# Altium PCB RF.PcbDoc
Units mm, origin at the board's own origin, x right, y up, seen from the top; angles counter-clockwise.
Board outline 90.1 x 47.1 mm, 2 copper layers (Top Layer, Bottom Layer); 48 components, 55 nets, 187 pads, 325 vias.
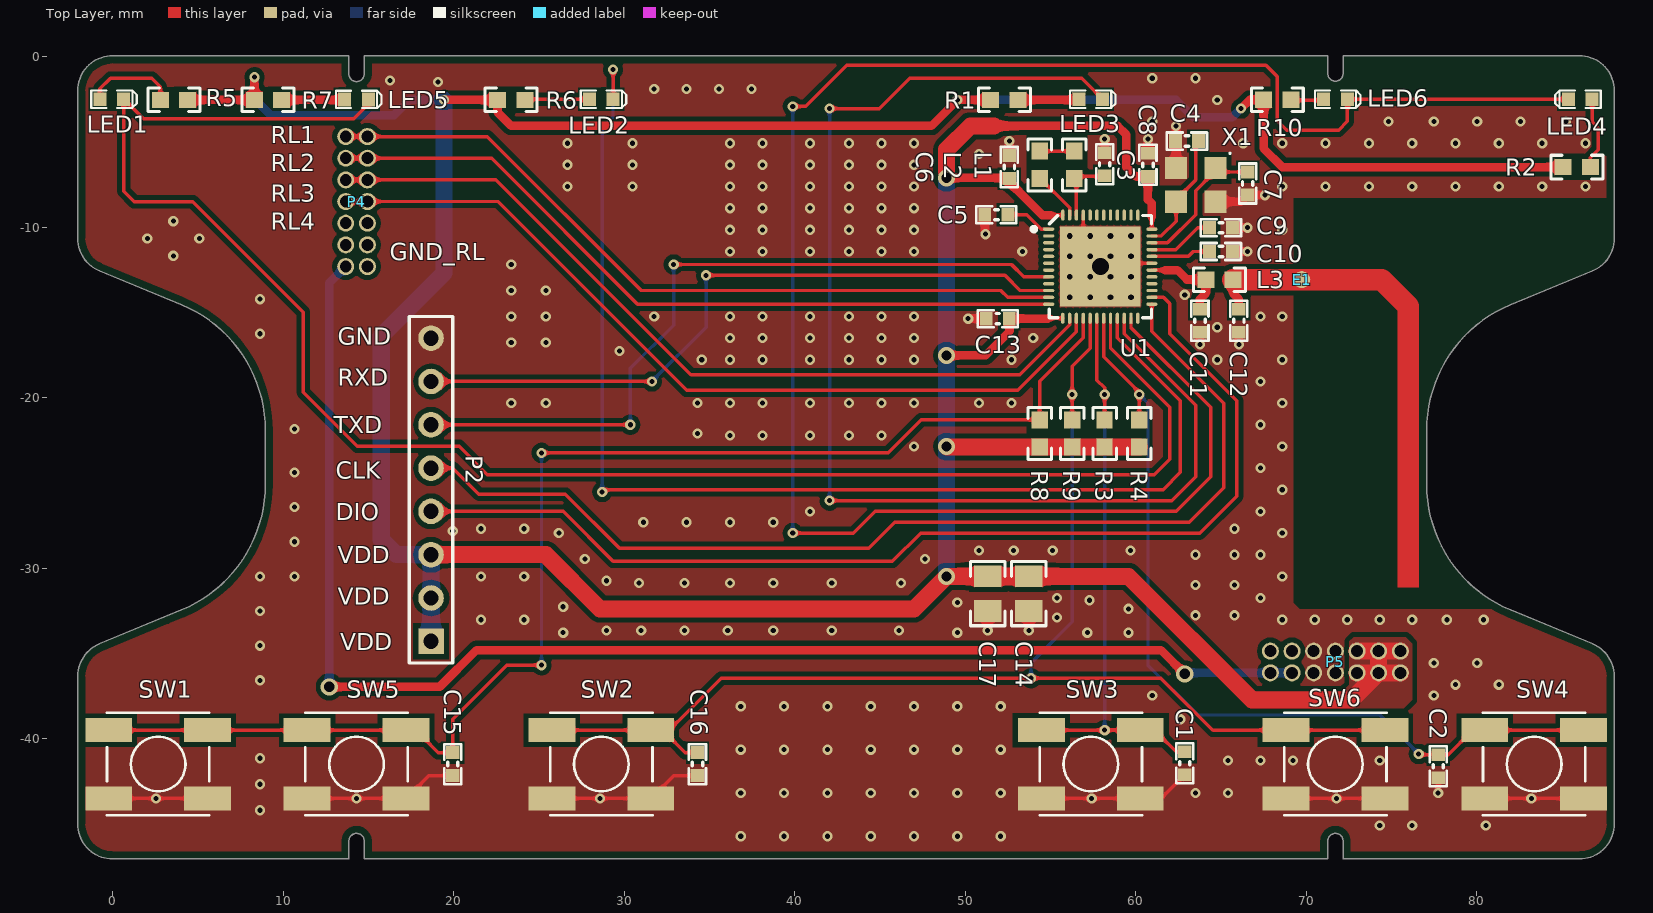
[diagram p0: Top Layer view]
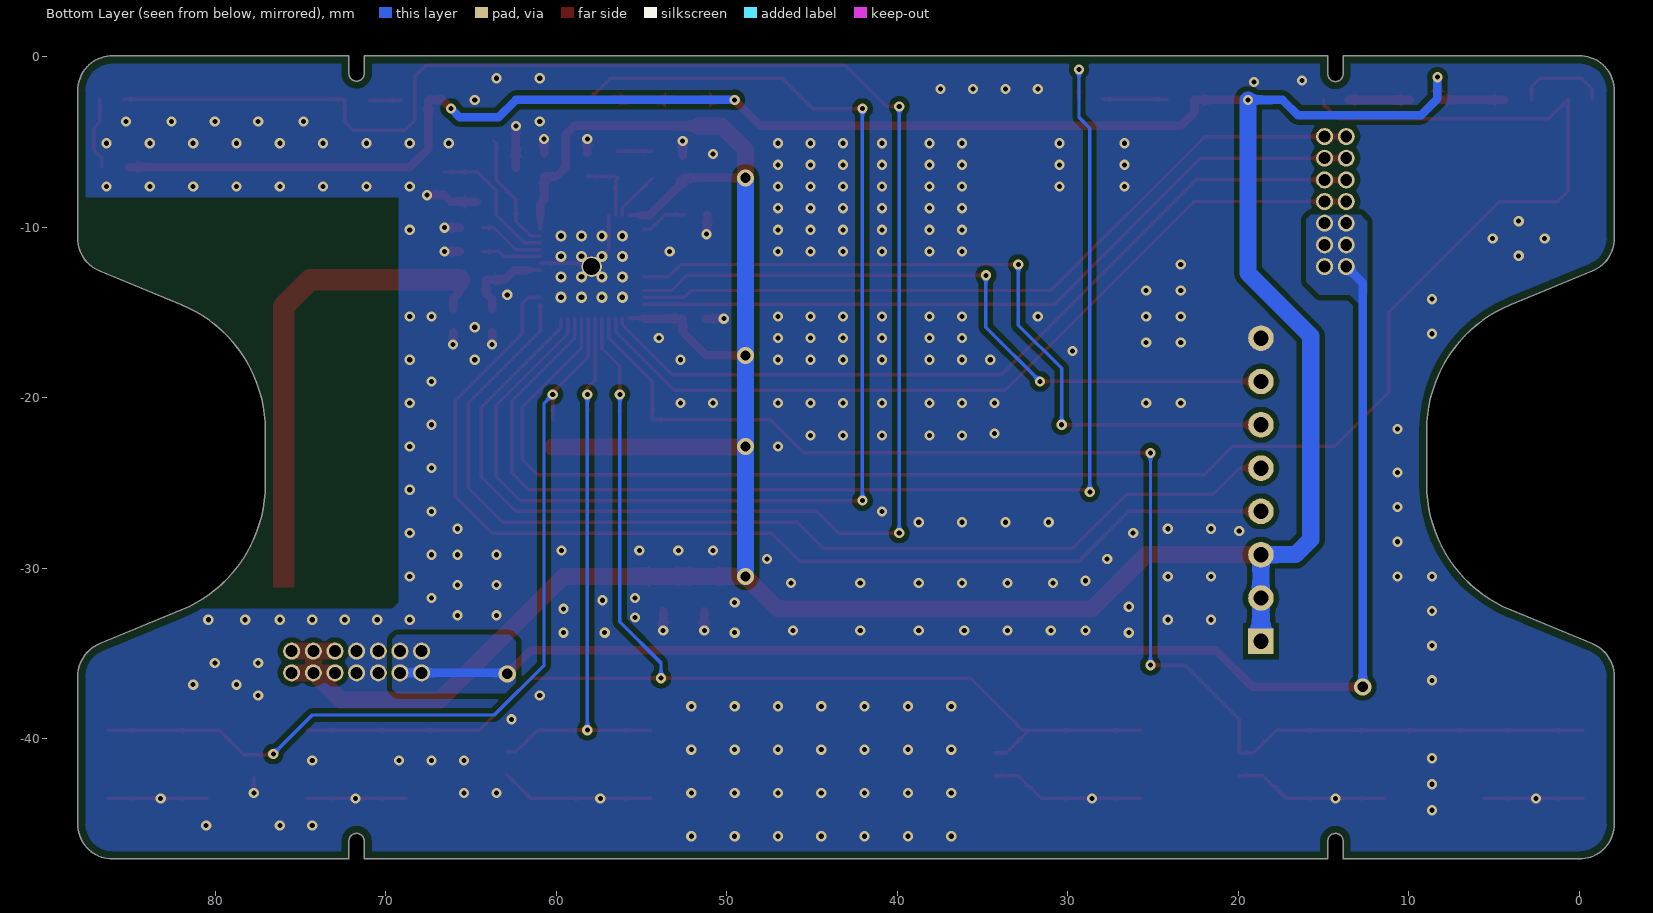
[diagram p1: Bottom Layer view, seen from below]
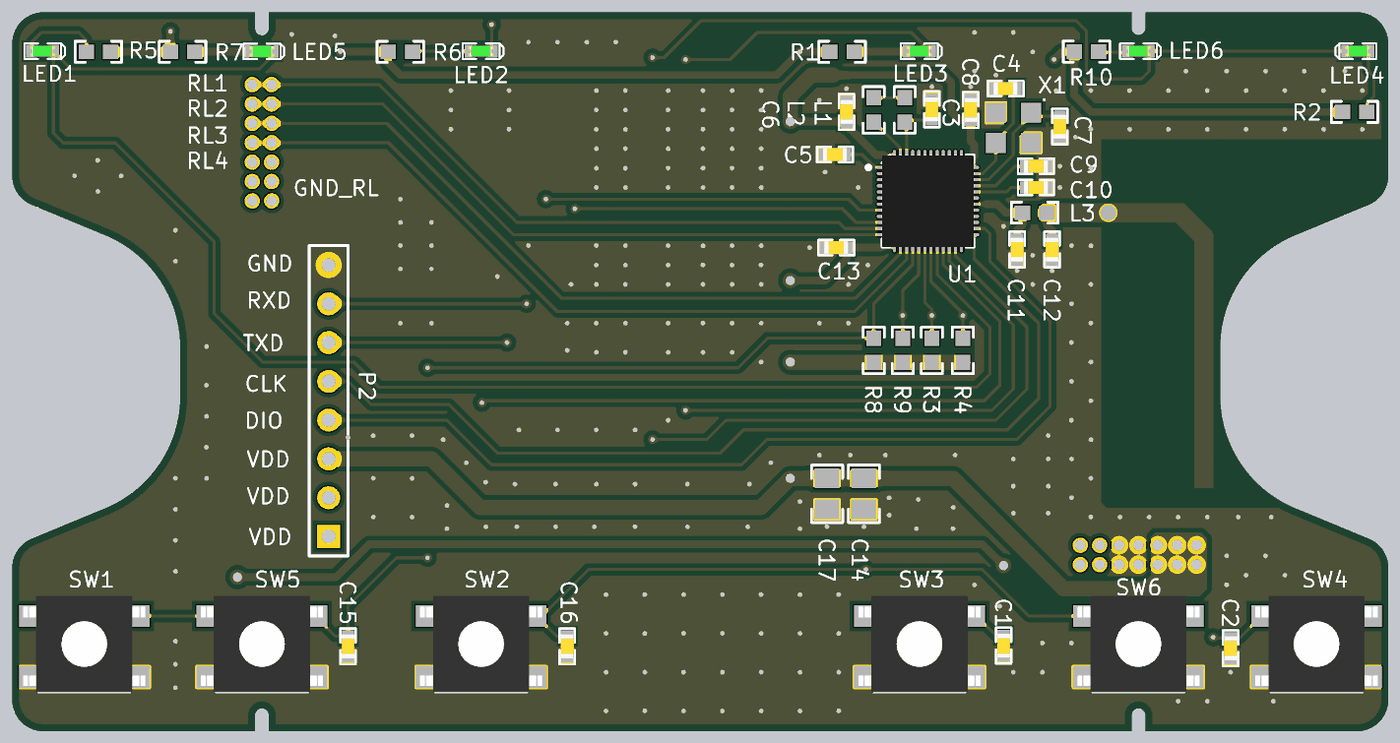
[diagram p2: 3D render of the assembled board from above, using the file's embedded part models]

## Layer stack, top to bottom
Top Solder: solder mask 0.0102, Solder Resist, Dk 3.5
Top Layer: signal copper 0.0356
Dielectric 1: dielectric 0.32, FR-4, Dk 4.8
Bottom Layer: signal copper 0.0356
Bottom Solder: solder mask 0.0102, Solder Resist, Dk 3.5

## Board outline
-2.05,-36.336 cw(c0,-36.336) -0.785,-34.442 4.042,-32.443 cw(c4.061,-32.489) 4.042,-32.443 ccw(c1,-25.098) 8.95,-25.098 8.95,-21.902 ccw(c1,-21.902) 4.042,-14.557 cw(c4.061,-14.511) 4.042,-14.557 -0.785,-12.558 cw(c0,-10.664) -2.05,-10.664 -2.05,-2 cw(c0,-2) 0,0.05 13.8,0.05 cw(c13.8,0) 13.85,0 13.85,-1.016 ccw(c14.3,-1.016) 14.75,-1.016 cw(c14.8,-1.016) 14.75,-1.016 14.75,0 cw(c14.8,0) 14.8,0.05 71.2,0.05 cw(c71.2,0) 71.25,0 71.25,-0.991 ccw(c71.7,-0.991) 72.15,-0.992 72.15,0 cw(c72.2,0) 72.2,0.05 86,0.05 cw(c86,-2) 88.05,-2 88.05,-10.664 cw(c86,-10.664) 86.785,-12.558 81.958,-14.557 ccw(c81.939,-14.511) 81.958,-14.557 ccw(c85,-21.902) 77.05,-21.902 77.05,-25.098 ccw(c85,-25.098) 81.958,-32.443 cw(c81.939,-32.489) 81.958,-32.443 86.785,-34.442 cw(c86,-36.336) 88.05,-36.336 88.05,-45 cw(c86,-45) 86,-47.05 72.2,-47.05 cw(c72.2,-47) 72.15,-47 72.15,-46.005 cw(c72.2,-46) 72.149,-46 ccw(c71.7,-46) 71.25,-45.985 71.25,-47 cw(c71.2,-47) 71.2,-47.05 14.8,-47.05 cw(c14.8,-47) 14.75,-47 14.75,-46.005 cw(c14.8,-46) 14.749,-46 ccw(c14.3,-46) 13.85,-45.995 cw(c13.8,-45.999) 13.85,-45.999 13.85,-47 cw(c13.8,-47) 13.8,-47.05 0,-47.05 cw(c0,-45) -2.05,-45

## Design rules (kind name [scope] priority, off if disabled: settings)
Clearance [All] p1: gap=0.3
HoleSize [All] p1: absolutevalues=TRUE maxlimit=10 minlimit=0.025 maxpercent=80.000 minpercent=20.000
MinimumSolderMaskSliver [All] p1: minsoldermaskwidth=0.01
PolygonConnect [All] p1: connectstyle=Direct reliefconductorwidth=0.254 reliefentries=4 polygonreliefangle="90 Angle" airgapwidth=0.254
RoutingVias [All] p1: holewidth=0.711 width=1.27 viastyle="Through Hole" minholewidth=0.3 minwidth=0.3 maxholewidth=5 maxwidth=5
SilkToSilkClearance [All] p1: silktosilkclearance=0.127
SilkToSolderMaskClearance [IsPad] p1: minsilkscreentomaskgap=0.01 clearancetoexposedcopper=TRUE
SolderMaskExpansion [All] p1: expansion=0.102
Width [All] p1: maxlimit=2 minlimit=0.2 preferedwidth=0.254
26 further rules are at their usual default settings.

## Components (designator, comment, footprint, x,y, rotation, side; value= is the part's Value field where it differs from the comment)
C1 "1.0µF" CAPC1608X06L 62.865,-41.442 r90 top
C2 "1.0µF" CAPC1608X06L 77.724,-41.616 r90 top
C3 "1.0µF" CAPC1608X06L 58.166,-6.31 r270 top
C4 "12pF" CAPC1608X06L 62.992,-4.953 r180 top
C5 "100nF" CAPC1608X06L 51.816,-9.271 r180 top
C6 "4.7µF" CAPC1608X06L 52.578,-6.477 r90 top
C7 "12pF" CAPC1608X06L 66.548,-7.442 r270 top
C8 "100nF" CAPC1608X06L 60.706,-6.35 r90 top
C9 "100pF" CAPC1608X06L 64.984,-10.033 r0 top
C10 "N.C." CAPC1608X06L 64.984,-11.43 r0 top
C11 "0.8pF" CAPC1608X06L 63.754,-15.494 r90 top
C12 "1.2pF" CAPC1608X06L 66.04,-15.494 r270 top
C13 "100nF" CAPC1608X06L 51.903,-15.367 r180 top
C14 "106" 0805_HV 53.721,-31.496 r90 top
C15 "1.0µF" CAPC1608X06L 19.939,-41.489 r270 top
C16 "1.0µF" CAPC1608X06L 34.29,-41.489 r90 top
C17 "104" 0805_HV 51.308,-31.496 r90 top
E1 "Antenna" nrfant 69.723,-13.081 r270 top
L1 "15nH" 0603 56.388,-6.35 r90 top
L2 "10µH" 0603 54.356,-6.35 r270 top
L3 "3.9nH" 0603 64.897,-13.081 r0 top
LED1 "L0603G" LED_0603_G -0.05,-2.5 r180 top
LED2 "L0603G" LED_0603_G 28.65,-2.5 r180 top
LED3 "L0603G" LED_0603_G 57.35,-2.5 r180 top
LED4 "L0603G" LED_0603_G 86.05,-2.5 r0 top
LED5 "L0603G" LED_0603_G 14.3,-2.515 r180 top
LED6 "L0603G" LED_0603_G 71.7,-2.501 r180 top
P2 "Header 8" HDR1X8 18.669,-34.29 r90 top
P4 "Header 7X2" CON14_1.27 13.665,-4.69 r270 top
P5 "Header 7X2" CON14_1.27 75.505,-34.865 r180 top
R1 "220R" 0603 52.286,-2.54 r180 top
R2 "220R" 0603 85.852,-6.477 r180 top
R3 "100k" 0603 58.166,-22.098 r270 top
R4 "100k" 0603 60.198,-22.098 r270 top
R5 "220R" 0603 3.594,-2.54 r0 top
R6 "220R" 0603 23.368,-2.54 r180 top
R7 "220R" 0603 9.106,-2.54 r180 top
R8 "100k" 0603 54.356,-22.098 r270 top
R9 "100k" 0603 56.261,-22.098 r270 top
R10 "220R" 0603 68.288,-2.527 r180 top
SW1 "PB SW" KSC521J 2.667,-41.499 r0 top locked
SW2 "PB SW" KSC521J 28.652,-41.499 r0 top locked
SW3 "PB SW" KSC521J 57.356,-41.499 r0 top locked
SW4 "PB SW" KSC521J 83.354,-41.499 r0 top locked
SW5 "PB SW" KSC521J 14.3,-41.499 r0 top locked
SW6 "PB SW" KSC521J 71.694,-41.499 r0 top locked
U1 "nRF52832-QFAA" QFN40P600X600X90-48N 57.912,-12.319 r0 top
X1 "CX3225SB32000D0FFFCC" SON230P260X60-4N 63.507,-7.524 r270 top

## Footprints (in the part's own frame and the unit in brackets; to place one, negate y for a bottom-side part, rotate by r counter-clockwise, add the part's x,y. Pads: shape width x height; smd on the part's side, far side on the other; paste and mask are expansions set on the pad)
0603 [mm] "0603 from SM-752 data"
  rect 1x0.95 smd: 1(-0.8,0) 2(0.8,0)
  silkscreen extent -1.52,-0.69 1.52,0.69, body extent -0.87,-0.47 0.87,0.47, height 1
0805_HV [mil] "0805 with 30mil clearance between pads"
  rect 50x63 smd: 1(-40,0) 2(40,0)
  silkscreen extent -74,-40 74,40, body extent -43,-29 43,29, height 57
CAPC1608X06L [mm]
  rect 0.75x0.8 smd: 1(-0.675,0) 2(0.675,0)
  silkscreen extent -1.17,-0.5 1.17,0.5, body extent -0.8,-0.43 0.8,0.43, height 0.8
CON14_1.27 [mm]
  round 1 hole 0.7: 1(0,0) 2(0,1.27) 3(1.27,0) 4(1.27,1.27) 5(2.54,0) 6(2.54,1.27) 7(3.81,0) 8(3.81,1.27) 9(5.08,0) 10(5.08,1.27) 11(6.35,0) 12(6.35,1.27) 13(7.62,0) 14(7.62,1.27)
HDR1X8 [mm] "Connector; Header; 8 Position"
  rect 1.5x1.5 hole 0.9: 1(0,0)
  round 1.5 hole 0.9: 2(2.54,0) 3(5.08,0) 4(7.62,0) 5(10.16,0) 6(12.7,0) 7(15.24,0) 8(17.78,0)
  silkscreen extent -1.27,-1.27 19.05,1.27
KSC521J [mm] "6.2×6.2mm TACT Switch, without ground connector"
  rect 2.75x1.4 smd: 1(-2.9,-2) 1(2.901,-2) 2(-2.9,2) 2(2.901,2)
  silkscreen extent -3,-2.99 3,3.01, body extent -4,-2.99 4,3.31, height 3.1
LED_0603_G [mil]
  rect 30x32 smd: 1(-27.5,0) 2(27.5,0)
  silkscreen extent -58,-20 48,20, body extent -32,-16 32,16, height 24
nrfant [mm]
  round 1 smd: 1(0,0)
  Top Layer region: 18.047,5.616 18.047,6.886 17.285,6.886 17.285,5.616
  Top Layer lines w1.27: 0,0 0,0.127 0,4.689 1.559,6.248 17.401,6.248
QFN40P600X600X90-48N [mm]
  oval 0.65x0.2 smd: 1(-3.025,2.2) 2(-3.025,1.8) 3(-3.025,1.4) 4(-3.025,1) 5(-3.025,0.6) 6(-3.025,0.2) 7(-3.025,-0.2) 8(-3.025,-0.6) 9(-3.025,-1) 10(-3.025,-1.4) 11(-3.025,-1.8) 12(-3.025,-2.2) 25(3.025,-2.2) 26(3.025,-1.8) 27(3.025,-1.4) 28(3.025,-1) 29(3.025,-0.6) 30(3.025,-0.2) 31(3.025,0.2) 32(3.025,0.6) 33(3.025,1) 34(3.025,1.4) 35(3.025,1.8) 36(3.025,2.2)
  oval 0.2x0.65 smd: 13(-2.2,-3.025) 14(-1.8,-3.025) 15(-1.4,-3.025) 16(-1,-3.025) 17(-0.6,-3.025) 18(-0.2,-3.025) 19(0.2,-3.025) 20(0.6,-3.025) 21(1,-3.025) 22(1.4,-3.025) 23(1.8,-3.025) 24(2.2,-3.025) 37(2.2,3.025) 38(1.8,3.025) 39(1.4,3.025) 40(1,3.025) 41(0.6,3.025) 42(0.2,3.025) 43(-0.2,3.025) 44(-0.6,3.025) 45(-1,3.025) 46(-1.4,3.025) 47(-1.8,3.025) 48(-2.2,3.025)
  rect 4.7x4.7 smd: 49(0,0)
  silkscreen extent -4.02,-3 3,3, body extent -3.02,-3.02 3.02,3.02, height 0.86
SON230P260X60-4N [mm] "SON, 4-Leads, Body 3.25x2.55mm, Pitch 2.30mm, IPC Medium Density"
  rect 1.3x1.3 smd: 1(-0.985,1.15) 2(-0.985,-1.15) 3(0.985,-1.15) 4(0.985,1.15)
  silkscreen extent -1.9,1.96 -1.8,2.06, body extent -1.3,-1.65 1.3,1.65, height 0.6

## Part data
C1 C2 C15 C16: library part C0402-1µ0, "Capacitor, X5R, ±5%"
C3: library part C0603-1µ0, "Capacitor, X7R, ±10%"
C4 C7: library part C0402-12p, "Capacitor, NP0, ±2%"
C5 C8 C13: library part C0402-100n, "Capacitor, X7R, ±10%"
C6: library part C0603-4µ7, "Capacitor, X5R, ±10%"
C9: library part C0402-100p, "Capacitor, NP0, ±5%"
C10: library part C0402-N.C., "Not mounted"
C11: library part C0402-0.8p, "Capacitor, NP0, ±5%"
C12: library part C0402-1.2p, "Capacitor, NP0, ±0.1pF"
C14 C17: library part CM, "Cap SMD"
E1: "Generic Antenna"
L1: library part L0402-15n, "Inductor, 320mA, ±5%"
L2: library part L0603-10µ, "Inductor, 80mA, ±10%"
L3: library part L0402-3n9, "Inductor, 170mA, ±0.1nH"
LED1 LED2 LED3 LED4 LED5 LED6: library part "LG L29K Smartled Green", "LED SMARTLED GREEN 570NM 0603"
P2: "Header, 8-Pin"
P4 P5: "Header, 7-Pin, Dual row"
R1 R2 R5 R6 R7 R10: library part R0402-220, "Resistor, ±1%, 0.063W"
R3 R4 R8 R9: library part R0402-100k, "Resistor, ±1%, 0.063W"
SW1 SW2 SW3 SW4 SW5 SW6: library part Switch-PB-6.2x6.3mm-SMD, "Tactile Switch, SPNO, SMD, 160gf, 6.2x6.3x2.5mm"
U1: "Multi-protocol Bluetooth Low Energy and 2.4GHz proprietary system-on-chip"
X1: library part XTAL_SMD2016_32MHz_8pF_Epson, "XTAL SMD 2016, 32MHz, Cl=8pF, Tol: ±10ppm, Stab: ±10ppm"

## Free pads (board coordinates)
  round 1.2 hole 1: 0(57.912,-12.319)

## Via types
v1: diameter 0.6, hole 0.3, Top Layer to Bottom Layer, tented both sides, 303 vias
v2: diameter 0.66, hole 0.33, Top Layer to Bottom Layer, tented both sides, 16 vias
v3: diameter 1, hole 0.6, Top Layer to Bottom Layer, tented both sides, 6 vias

## Nets (pads, with @x,y where several pads share a name; then routed paths per layer and width w, separated by ;. In a path a pad name is that pad's centre, name@x,y a point inside that pad or via, vN(x,y) a via of type N, cw(c..) or ccw(c..) an arc to the next point about the centre after c; other vN are vias at no path point)
ANT: C12.1 E1.1 L3.2 | length 6
  Top Layer w0.5: L3.2 65.697,-13.881 66.04,-14.224 C12.1
  Top Layer w1.27: L3.2 E1.1 E1.1@69.85,-13.081
BUTTON1: C15.1 R8.1 SW1.2 SW5.2 U1.16 | length 78.7
  Top Layer w0.2: SW1.2@-0.233,-39.499 5.568,-39.499 11.4,-39.499 17.201,-39.499 17.782,-39.499 19.097,-40.814 C15.1 19.939,-38.862 23.114,-35.687 v1(25.146,-35.687) ; v1(25.146,-23.241) 45.466,-23.241 47.409,-21.298 R8.1 54.356,-19.05 56.912,-16.494 U1.16
  Bottom Layer w0.2: v1(25.146,-35.687) v1(25.146,-23.241)
BUTTON2: C16.2 R9.1 SW2.2 SW6.2 U1.17 | length 78.1
  Top Layer w0.2: SW2.2@25.752,-39.499 31.553,-39.499 SW2.2@32.26,-39.499 ; C16.2 33.575,-40.814 SW2.2@32.26,-39.499 ; R9.1@56.261,-21.463 R9.1 v1(56.261,-19.812) 56.261,-18.161 57.312,-17.11 U1.17 ; SW6.2@74.595,-39.499 68.794,-39.499 64.518,-39.499 61.468,-36.449 v1(53.848,-36.449) 35.687,-36.449 32.637,-39.499 SW2.2@32.26,-39.499
  Bottom Layer w0.2: v1(53.848,-36.449) 53.848,-35.56 56.261,-33.147 v1(56.261,-19.812)
BUTTON3: C1.2 R3.1 SW3.2 U1.18 | length 34.8
  Top Layer w0.2: SW3.2@54.456,-39.499 60.257,-39.499 61.089,-39.499 62.357,-40.767 C1.2 ; U1.18 57.712,-18.977 58.166,-19.431 v1(58.166,-19.812) R3.1
  Bottom Layer w0.2: v1(58.166,-39.497) v1(58.166,-19.812)
BUTTON4: C2.2 R4.1 SW4.2 U1.19 | length 51.2
  Top Layer w0.2: U1.19 58.112,-17.599 60.198,-19.685 v1(60.198,-19.812) R4.1 ; v1(76.581,-40.894) 76.628,-40.941 C2.2 78.312,-40.941 79.754,-39.499 80.454,-39.499 SW4.2@86.255,-39.499
  Bottom Layer w0.2: v1(60.198,-19.812) 60.706,-20.32 60.706,-35.687 63.627,-38.608 74.295,-38.608 v1(76.581,-40.894)
CTS: 
DEC1: C5.1 U1.1 | length 2.7
  Top Layer w0.2: C5.1 53.594,-9.271 54.442,-10.119 U1.1
DEC2: C10.1 U1.32 | length 3.5
  Top Layer w0.2: U1.32 63.084,-11.719 63.373,-11.43 C10.1
DEC3: C9.1 U1.33 | length 3.9
  Top Layer w0.2: U1.33 62.341,-11.319 63.627,-10.033 C9.1
DEC4: C3.2 L1.1 U1.46 | length 4
  Top Layer w0.2: U1.46 56.512,-7.274 L1.1 56.513,-7.025 C3.2@58.166,-7.025
GND: C1.1 C2.1 C3.1 C4.2 C5.2 C6.2 C7.2 C8.2 C9.2 C10.2 C11.1 C12.2 C13.2 C14.1 C15.2 C16.1 C17.1 P2.8 P5.7 P5.8 P5.9 P5.10 pad.0 SW1.1 SW2.1 SW3.1 SW4.1 SW5.1 SW6.1 U1.31 U1.45 U1.49 X1.2 X1.4 | length 67.8
  Top Layer w0.2: SW1.1@-0.233,-43.499 v1(2.54,-43.499) SW1.1@5.568,-43.499 ; SW5.1@11.4,-43.499 v1(14.3,-43.499) 17.201,-43.499 18.536,-42.164 C15.2 ; SW2.1@25.752,-43.499 v1(28.575,-43.499) 31.553,-43.499 32.888,-42.164 C16.1 ; SW3.1@54.456,-43.499 v1(57.404,-43.499) 60.257,-43.499 61.483,-43.499 C1.1 ; U1.45 56.912,-11.319 v2(57.312,-11.719) pad.0 58.112,-12.119 U1.31 ; SW6.1@68.794,-43.499 v1(71.755,-43.499) SW6.1@74.595,-43.499 ; v1(77.724,-43.18) C2.1 ; SW4.1@80.454,-43.499 v1(83.185,-43.499) SW4.1@86.255,-43.499
  Top Layer w0.5: v1(50.165,-15.367) C13.2 ; C5.2 51.141,-10.374 v1(51.181,-10.414) ; v1(51.308,-33.655) C17.1 ; C6.2 v1(52.578,-4.953) ; v1(53.721,-33.655) C14.1 ; C3.1 v1(58.166,-4.826) ; C8.2 v1(60.706,-4.826) ; X1.2 v1(62.357,-4.064) ; v1(63.754,-16.891) C11.1 ; X1.4 66.156,-8.509 C7.2 67.553,-8.117 v1(67.564,-8.128) ; C10.2 v1(66.548,-11.43) ; C9.2 v1(66.548,-10.033) ; v1(66.04,-16.891) C12.2
  other v1: 36.83,-45.72 39.37,-45.72 41.91,-45.72 44.45,-45.72 46.99,-45.72 49.53,-45.72 52.07,-45.72 74.295,-45.085 76.2,-45.085 80.518,-45.085 8.636,-44.196 36.83,-43.18 39.37,-43.18 41.91,-43.18 44.45,-43.18 46.99,-43.18 49.53,-43.18 52.07,-43.18 63.5,-43.18 65.405,-43.18 8.636,-42.672 65.405,-41.275 67.31,-41.275 69.215,-41.275 74.295,-41.275 8.636,-41.148 36.83,-40.64 39.37,-40.64 41.91,-40.64 44.45,-40.64 46.99,-40.64 49.53,-40.64 52.07,-40.64 62.611,-38.862 36.83,-38.1 39.37,-38.1 41.91,-38.1 44.45,-38.1 46.99,-38.1 49.53,-38.1 52.07,-38.1 60.96,-37.465 77.47,-37.465 78.74,-36.83 81.28,-36.83 8.636,-36.576 77.47,-35.56 80.01,-35.56 8.636,-34.544 26.416,-33.782 49.53,-33.782 57.15,-33.782 59.563,-33.782 28.956,-33.655 30.988,-33.655 33.528,-33.655 36.068,-33.655 38.735,-33.655 42.164,-33.655 46.101,-33.655 21.59,-33.02 24.13,-33.02 68.58,-33.02 70.485,-33.02 72.39,-33.02 74.295,-33.02 76.2,-33.02 78.232,-33.02 80.391,-33.02 55.372,-32.893 63.5,-32.766 65.786,-32.766 8.636,-32.512 59.563,-32.385 26.416,-32.258 49.53,-32.004 57.277,-31.877 55.372,-31.75 67.31,-31.75 63.5,-30.988 65.786,-30.988 30.861,-30.861 33.528,-30.861 36.195,-30.861 38.735,-30.861 42.164,-30.861 46.228,-30.861 28.956,-30.734 8.636,-30.48 10.668,-30.48 21.59,-30.48 24.13,-30.48 68.58,-30.48 27.686,-29.464 47.625,-29.464 63.5,-29.21 65.786,-29.21 67.31,-29.21 50.8,-28.956 52.832,-28.956 55.118,-28.956 59.69,-28.956 10.668,-28.448 26.162,-27.94 68.58,-27.94 19.939,-27.813 21.59,-27.686 24.13,-27.686 65.786,-27.686 31.115,-27.305 33.655,-27.305 36.195,-27.305 38.735,-27.305 40.894,-26.67 67.31,-26.67 10.668,-26.416 68.58,-25.4 10.668,-24.384 67.31,-24.13 46.99,-22.86 68.58,-22.86 36.195,-22.225 38.1,-22.225 40.894,-22.225 43.18,-22.225 45.085,-22.225 34.29,-22.098 10.668,-21.844 67.31,-21.59 23.368,-20.32 25.4,-20.32 34.29,-20.32 36.195,-20.32 38.1,-20.32 40.894,-20.32 43.18,-20.32 45.085,-20.32 46.99,-20.32 50.8,-20.32 52.705,-20.32 68.58,-20.32 67.31,-19.05 34.544,-17.78 36.195,-17.78 38.1,-17.78 40.894,-17.78 43.18,-17.78 45.085,-17.78 46.99,-17.78 52.705,-17.78 64.77,-17.78 68.58,-17.78 29.718,-17.272 23.368,-16.764 25.4,-16.764 36.195,-16.51 38.1,-16.51 40.894,-16.51 43.18,-16.51 45.085,-16.51 46.99,-16.51 53.975,-16.51 8.636,-16.256 64.77,-15.875 23.368,-15.24 25.4,-15.24 31.75,-15.24 36.195,-15.24 38.1,-15.24 40.894,-15.24 43.18,-15.24 45.085,-15.24 46.99,-15.24 67.31,-15.24 68.58,-15.24 8.636,-14.224 62.865,-13.97 23.368,-13.716 25.4,-13.716 23.368,-12.192 3.556,-11.684 36.195,-11.43 38.1,-11.43 40.894,-11.43 43.18,-11.43 45.085,-11.43 46.99,-11.43 53.34,-11.43 2.032,-10.668 5.08,-10.668 36.195,-10.16 38.1,-10.16 40.894,-10.16 43.18,-10.16 45.085,-10.16 46.99,-10.16 68.58,-10.16 3.556,-9.652 36.195,-8.89 38.1,-8.89 40.894,-8.89 43.18,-8.89 45.085,-8.89 46.99,-8.89 26.67,-7.62 30.48,-7.62 36.195,-7.62 38.1,-7.62 40.894,-7.62 43.18,-7.62 45.085,-7.62 46.99,-7.62 68.58,-7.62 71.12,-7.62 73.66,-7.62 76.2,-7.62 78.74,-7.62 81.28,-7.62 83.82,-7.62 86.36,-7.62 26.67,-6.35 30.48,-6.35 36.195,-6.35 38.1,-6.35 40.894,-6.35 43.18,-6.35 45.085,-6.35 46.99,-6.35 50.8,-5.715 26.67,-5.08 30.48,-5.08 36.195,-5.08 38.1,-5.08 40.894,-5.08 43.18,-5.08 45.085,-5.08 46.99,-5.08 66.294,-5.08 68.58,-5.08 71.12,-5.08 73.66,-5.08 76.2,-5.08 78.74,-5.08 81.28,-5.08 83.82,-5.08 86.36,-5.08 60.96,-3.81 74.803,-3.81 77.47,-3.81 80.01,-3.81 82.55,-3.81 85.217,-3.81 64.77,-2.54 31.75,-1.905 33.655,-1.905 35.56,-1.905 37.465,-1.905 19.075,-1.499 16.256,-1.397 60.96,-1.27 63.5,-1.27
  other v2: 56.112,-14.119 57.312,-14.119 58.512,-14.119 59.712,-14.119 56.112,-12.919 57.312,-12.919 58.512,-12.919 59.712,-12.919 56.112,-11.719 58.512,-11.719 59.712,-11.719 56.112,-10.519 57.312,-10.519 58.512,-10.519 59.712,-10.519
GND_RL: P4.9 P4.10 P4.11 P4.12 P4.13 P4.14 P5.11 P5.12 P5.13 P5.14 | length 83
  Top Layer w0.5: v3(12.7,-36.957) 19.177,-36.957 21.336,-34.798 61.468,-34.798 v3(62.865,-36.195)
  Bottom Layer w0.5: v3(12.7,-36.957) 12.7,-13.275 P4.13 ; v3(62.865,-36.195) 62.925,-36.135 P5.14 P5.12
LED1: LED1.1 LED5.1 U1.20 | length 101.9
  Top Layer w0.2: LED1.1 0.648,-7.887 1.27,-8.509 4.699,-8.509 11.176,-14.986 11.176,-19.685 14.351,-22.86 20.32,-22.86 21.971,-24.511 61.087,-24.511 61.976,-23.622 61.976,-20.574 58.512,-17.11 U1.20 ; LED1.1 1.806,-3.658 14.148,-3.658 14.999,-2.807 LED5.1
LED2: LED2.1 U1.21 | length 71.7
  Top Layer w0.2: v1(28.702,-25.527) 28.829,-25.4 61.595,-25.4 62.611,-24.384 62.611,-20.193 58.912,-16.494 U1.21 ; v1(29.337,-0.762) 29.35,-0.775 LED2.1@29.35,-2.5
  Bottom Layer w0.2: v1(28.702,-25.527) 28.702,-4.191 29.337,-3.556 v1(29.337,-0.762)
LED3: LED3.1 U1.22 | length 73.3
  Top Layer w0.2: v1(42.037,-26.035) 62.103,-26.035 63.5,-24.638 63.5,-20.447 59.312,-16.259 U1.22 ; v1(42.037,-3.048) 44.958,-3.048 46.736,-1.27 56.818,-1.27 LED3.1
  Bottom Layer w0.2: v1(42.037,-26.035) v1(42.037,-3.048)
LED4: LED4.1 LED6.1 U1.23 | length 113.2
  Top Layer w0.2: v1(39.878,-27.94) 43.434,-27.94 44.704,-26.67 62.357,-26.67 64.389,-24.638 64.389,-20.574 59.712,-15.897 U1.23 ; v1(39.878,-2.921) 40.64,-2.921 43.053,-0.508 67.627,-0.508 68.288,-1.169 68.288,-3.772 68.834,-4.318 71.882,-4.318 72.398,-3.802 LED6.1 72.399,-2.5 LED4.1
  Bottom Layer w0.2: v1(39.878,-27.94) v1(39.878,-2.921)
NetC11_2: C11.2 L3.1 U1.30 | length 5.3
  Top Layer w0.2: U1.30 61.722,-12.519
  Top Layer w0.5: 61.722,-12.519 62.43,-12.519 62.992,-13.081 L3.1 64.097,-13.881 63.754,-14.224 C11.2
NetL1_2: L1.2 L2.1 | length 2
  Top Layer w0.2: L2.1 L1.2
NetL2_2: L2.2 U1.47 | length 2.9
  Top Layer w0.2: L2.2 54.394,-7.15 56.112,-8.868 U1.47
NetLED1_2: LED1.2 R5.1 | length 5.4
  Top Layer w0.2: LED1.2 -0.749,-1.892 -0.127,-1.27 2.286,-1.27 2.794,-1.778 R5.1
NetLED2_2: LED2.2 R6.1 | length 3.8
  Top Layer w0.2: R6.1 24.208,-2.5 LED2.2
NetLED3_2: LED3.2 R1.1 | length 3.6
  Top Layer w0.5: R1.1 56.611,-2.54 LED3.2
NetLED4_2: LED4.2 R2.1 | length 4.3
  Top Layer w0.2: R2.1 86.652,-5.931 87.122,-5.461 87.122,-4.191 86.749,-3.818 LED4.2
NetLED5_2: LED5.2 R7.1 | length 3.6
  Top Layer w0.5: R7.1 LED5.2@13.513,-2.54
NetLED6_2: LED6.2 R10.1 | length 1.9
  Top Layer w0.2: R10.1@69.037,-2.565 LED6.2@70.95,-2.565
P0.00: U1.2
P0.01: U1.3
P0.02: U1.4
P0.03: U1.5
P0.04: U1.6
P0.05: U1.7
P0.06: P2.6 U1.8 | length 44.4
  Top Layer w0.2: P2.6 v1(30.353,-21.59) ; v1(32.893,-12.192) 52.705,-12.192 53.432,-12.919 U1.8
  Bottom Layer w0.2: v1(30.353,-21.59) 30.353,-18.288 32.893,-15.748 v1(32.893,-12.192)
P0.07: U1.9
P0.08: P2.7 U1.10 | length 41
  Top Layer w0.2: P2.7 v1(31.623,-19.05) ; v1(34.798,-12.827) 52.324,-12.827 53.216,-13.719 U1.10
  Bottom Layer w0.2: v1(31.623,-19.05) 34.798,-15.875 v1(34.798,-12.827)
P0.11: P4.5 P4.6 U1.14 | length 48.8
  Top Layer w0.2: P4.5 P4.6 22.47,-7.23 33.909,-18.669 53.178,-18.669 56.112,-15.735 U1.14
P0.12: P4.7 P4.8 U1.15 | length 49.6
  Top Layer w0.2: P4.7 P4.8 22.597,-8.5 33.655,-19.558 53.083,-19.558 56.512,-16.129 U1.15
P0.21: U1.24
P0.22: U1.27
P0.23: U1.28
P0.24: U1.29
P0.25: U1.37
P0.26: U1.38
P0.27: U1.39
P0.28: U1.40
P0.29: U1.41
P0.30: U1.42
P0.31: U1.43
RL1C: P4.1 P4.2 U1.11 | length 45.1
  Top Layer w0.2: P4.1 P4.2 21.962,-4.69 30.988,-13.716 52.07,-13.716 52.473,-14.119 U1.11
RL2C: P4.3 P4.4 U1.12 | length 44.8
  Top Layer w0.2: P4.3 P4.4 22.216,-5.96 30.775,-14.519 U1.12
RTS: 
SWDCLK: P2.5 U1.25 | length 62.4
  Top Layer w0.2: P2.5 19.939,-24.13 21.463,-25.654 26.543,-25.654 29.718,-28.829 44.323,-28.829 45.847,-27.305 63.119,-27.305 65.151,-25.273 65.151,-20.32 60.937,-16.106 U1.25
SWDIO: P2.4 U1.26 | length 64.2
  Top Layer w0.2: P2.4 26.416,-26.67 29.337,-29.591 45.72,-29.591 47.371,-27.94 63.754,-27.94 65.913,-25.781 65.913,-20.193 61.976,-16.256 61.976,-14.478 61.617,-14.119 U1.26
VDD_NRF: C6.1 C8.1 C13.1 C14.2 C17.2 P2.1 P2.2 P2.3 P5.1 P5.2 P5.3 P5.4 P5.5 P5.6 R1.2 R2.2 R3.2 R4.2 R5.2 R6.2 R7.2 R8.2 R9.2 R10.2 U1.13 U1.36 U1.48 | length 264.4
  Top Layer w0.2: v3(48.895,-22.86) v3@48.933,-22.898 ; C6.1@52.538,-7.112 C6.1 C6.1@52.578,-7.366 ; 54.864,-15.344 U1.13 ; 54.991,-9.294 U1.48 ; U1.36 60.937,-9.398
  Top Layer w0.5: R5.2 R7.2 8.306,-1.219 v1(8.319,-1.206) ; v1(19.431,-2.54) R6.2 22.568,-3.264 23.368,-4.064 48.006,-4.064 v1(49.53,-2.54) R1.2 ; v3(48.895,-17.526) 51.181,-17.526 52.578,-16.129 C13.1 54.841,-15.367 54.864,-15.344 ; v3@49.276,-7.112 C6.1@52.538,-7.112 ; 51.689,-4.064 58.928,-4.064 59.436,-4.572 59.436,-6.477 59.984,-7.025 C8.1 60.706,-8.382 60.937,-8.613 60.937,-9.398 ; C6.1@52.578,-7.366 54.506,-9.294 54.991,-9.294 ; v1(66.167,-3.048) 66.688,-2.527 R10.2 67.488,-5.385 68.58,-6.477 R2.2
  Top Layer w1: P2.3 25.4,-29.21 28.575,-32.385 46.99,-32.385 v3(48.895,-30.48) C17.2 C14.2 59.563,-30.48 66.802,-37.719 72.644,-37.719 P5.4@74.228,-36.135 ; v3@48.895,-6.731 48.895,-5.461 50.292,-4.064 51.689,-4.064 ; v3@48.933,-22.898 R8.2 R9.2 R3.2 R4.2 ; P5.6 P5.4@74.228,-36.135 ; P5.5 P5.3 ; P5.2 P5.4 ; P5.1 P5.3 ; P5.4@74.228,-36.135 P5.4 ; P5.4 P5.3
  Bottom Layer w0.2: v3@48.895,-7.239 v3(48.895,-7.112)
  Bottom Layer w0.5: v1(8.319,-1.206) 8.319,-2.476 9.271,-3.429 16.51,-3.429 17.399,-2.54 v1(19.431,-2.54) ; v1(49.53,-2.54) 62.357,-2.54 63.373,-3.556 65.659,-3.556 v1(66.167,-3.048)
  Bottom Layer w1: P2.1 P2.2 P2.3 16.637,-29.21 15.748,-28.321 15.748,-16.383 19.431,-12.7 v1(19.431,-2.54) ; v3(48.895,-30.48) v3(48.895,-22.86) v3(48.895,-17.526) ; v3@48.895,-17.272 v3@48.895,-7.239
XC1: C7.1 U1.34 X1.1 | length 8.2
  Top Layer w0.2: U1.34 61.852,-10.919 63.5,-9.271 63.5,-7.874 64.657,-6.717 64.707,-6.767 C7.1
XC2: C4.1 U1.35 X1.3 | length 7
  Top Layer w0.2: U1.35 61.49,-10.519 62.357,-9.652 X1.3 62.357,-8.382 63.5,-7.239 63.5,-5.12 C4.1
pads on no net: U1.44

## Polygon pours and split planes (outlines as drawn)
GND_RL on Bottom Layer "Bottom Layer-No Net" (solid, remove dead copper, pour order 9): 69.596,-37.084 69.596,-34.163 69.342,-33.909 68.453,-33.909 62.738,-33.909 62.357,-34.29 62.357,-35.687 62.357,-36.703 62.738,-37.084 62.992,-37.338 64.262,-37.338 69.342,-37.338 69.596,-37.084
GND_RL on Bottom Layer "Bottom Layer-No Net" (solid, remove dead copper, pour order 8): 15.748,-9.271 13.589,-9.271 12.827,-9.271 12.573,-9.525 12.446,-9.652 12.446,-13.843 12.446,-13.97 12.954,-14.478 13.462,-13.97 14.224,-13.97 15.24,-13.97 16.002,-13.208 16.002,-9.525
GND on Bottom Layer "Bottom Layer-No Net" (solid, remove dead copper, pour order 7): 193 vertices, not listed, extent -2.032,-47 88,0
VDD_NRF on Top Layer "Bottom Layer-No Net" (solid, remove dead copper, pour order 10): 72.517,-34.29 72.517,-36.83 72.39,-36.957 72.136,-37.211 71.755,-37.211 66.929,-37.211 66.675,-37.465 66.802,-37.592 66.802,-38.227 74.803,-38.227 75.692,-38.227 75.946,-37.973 76.2,-37.719 76.2,-36.068 76.2,-34.417 75.946,-34.163 75.819,-34.036 73.787,-34.036 72.771,-34.036 72.517,-34.29
GND on Top Layer "Bottom Layer-No Net" (solid, remove dead copper, pour order 6): 187 vertices, not listed, extent -2.009,-47.021 88.023,-0.021

## Silkscreen, mask and mechanical layers (free items; w line width, h text height)
Top Overlay:
  text "RL1" at 9.271,-5.08 h1
  text "RL2" at 9.271,-6.731 h1
  text "RL3" at 9.271,-8.509 h1
  text "RL4" at 9.271,-10.16 h1
  text "GND_RL" at 16.256,-11.938 h1
  text "GND" at 13.208,-16.891 h1
  text "RXD" at 13.208,-19.304 h1
  text "TXD" at 12.954,-22.098 h1
  text "CLK" at 13.081,-24.765 h1
  text "DIO" at 13.081,-27.178 h1
  text "VDD" at 13.208,-29.718 h1
  text "VDD" at 13.208,-32.131 h1
  text "VDD" at 13.335,-34.798 h1
Mechanical 2:
  circle w0.006: c88,-2 r0.003
  circle w0.006: c-2,-2 r0.003
  circle w0.006: c-2,9.526 r0.003
  circle w0.006: c86,0 r0.003
  circle w0.006: c86,-49 r0.003
  circle w0.006: c96.171,-49 r0.003
  lines w0.1: 2,-47 6,-47 ; 2,0 6,0 ; 14.8,-46 ccw(c14.3,-46) 13.8,-46 13.8,-47 0,-47 cw(c0,-45) -2,-45 -2,-36.336 cw(c0,-36.336) -0.765,-34.489 4.061,-32.489 ccw(c1,-25.098) 9,-25.098 9,-21.902 ccw(c1,-21.902) 4.061,-14.511 -0.765,-12.511 cw(c0,-10.664) -2,-10.664 -2,-2 cw(c0,-2) 0,0 13.8,0 13.8,-1.016 ccw(c14.3,-1.016) 14.8,-1.016 14.8,0 71.2,0 71.2,-0.991 ccw(c71.7,-0.991) 72.2,-0.991 ; 14.8,-46 14.8,-47 71.2,-47 71.2,-45.974 ; 21.6,0 22.4,0 ; 28.6,0 29.4,0 ; 33,-47 34,-47 ; 35.6,0 36.4,0 ; 42.6,0 43.4,0 ; 49.6,0 50.4,0 ; 52,-47 53,-47 ; 56.6,0 57.4,0 ; 63.6,0 64.4,0 ; 71.2,-46 cw(c71.7,-46) 72.2,-46 ; 72.2,-45.974 72.2,-47 86,-47 ccw(c86,-45) 88,-45 88,-36.336 ccw(c86,-36.336) 86.765,-34.489 81.939,-32.489 cw(c85,-25.098) 77,-25.098 77,-21.902 cw(c85,-21.902) 81.939,-14.511 86.765,-12.511 ccw(c86,-10.664) 88,-10.664 88,-2 ccw(c86,-2) 86,0 72.2,0 72.2,-1.016 ; 80,-47 84,-47 ; 80,0 84,0
Mechanical 3:
  drawing of 275 lines, arcs and shapes, not listed